# Altium PCB PCB1.PcbDoc
Units mil, origin at the board's own origin, x right, y up, seen from the top; angles counter-clockwise.
Board outline 6299.21 x 3937.01 mil, 4 copper layers (Top Layer, Top Inner, Bottom Inner, Bottom Layer), stack 60.709 mil thick; 58 components, 46 nets, 194 pads, 24 vias.
Unrouted connection lines stored in the file: 96.
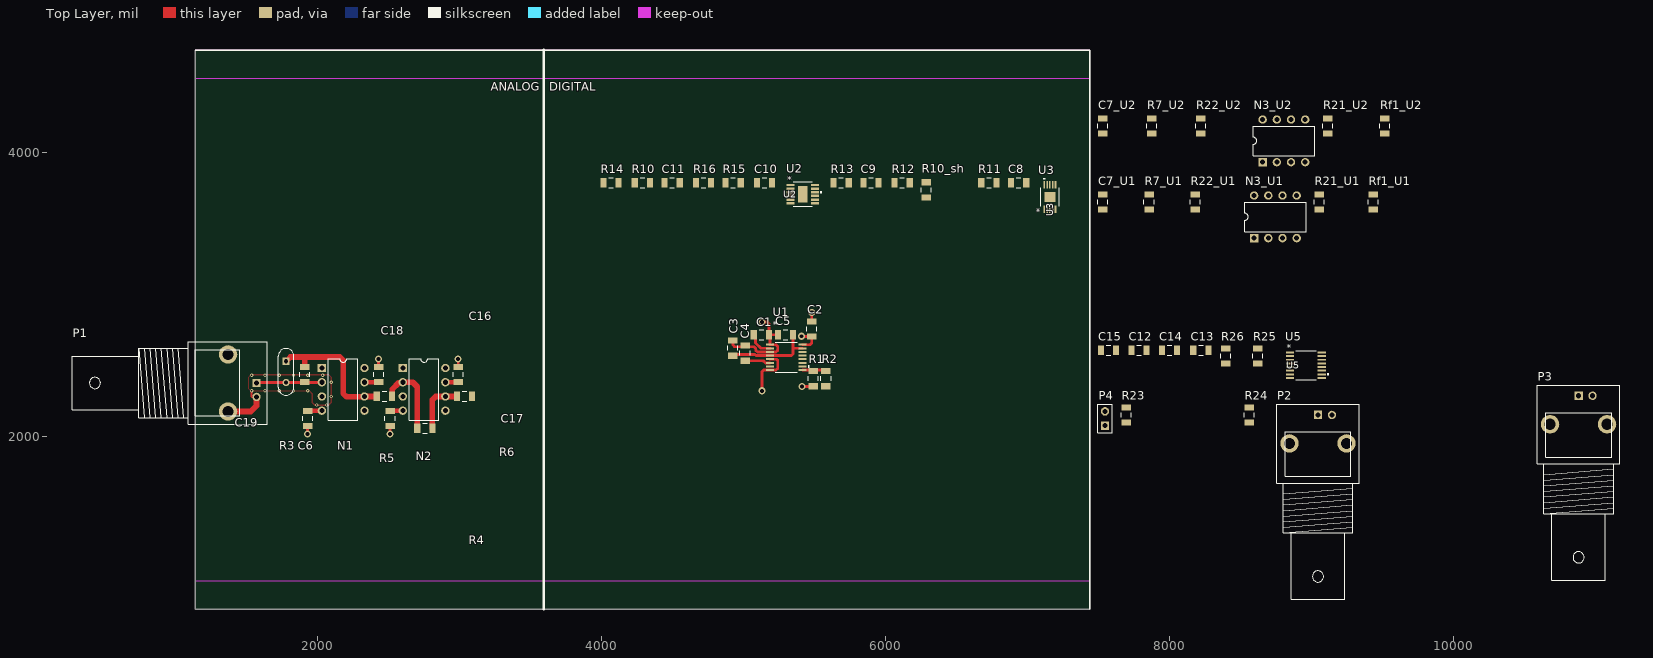
[diagram p0: Top Layer view]
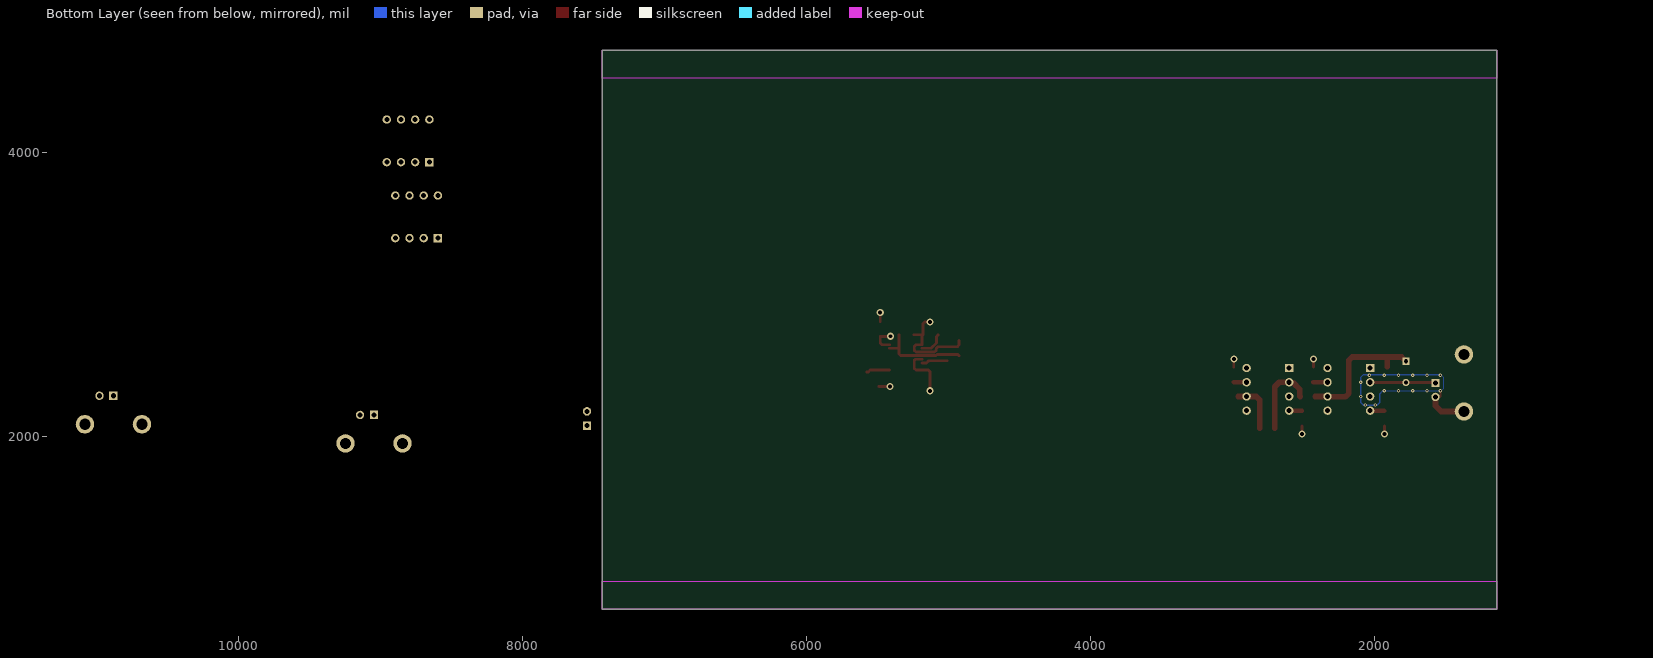
[diagram p1: Bottom Layer view, seen from below]
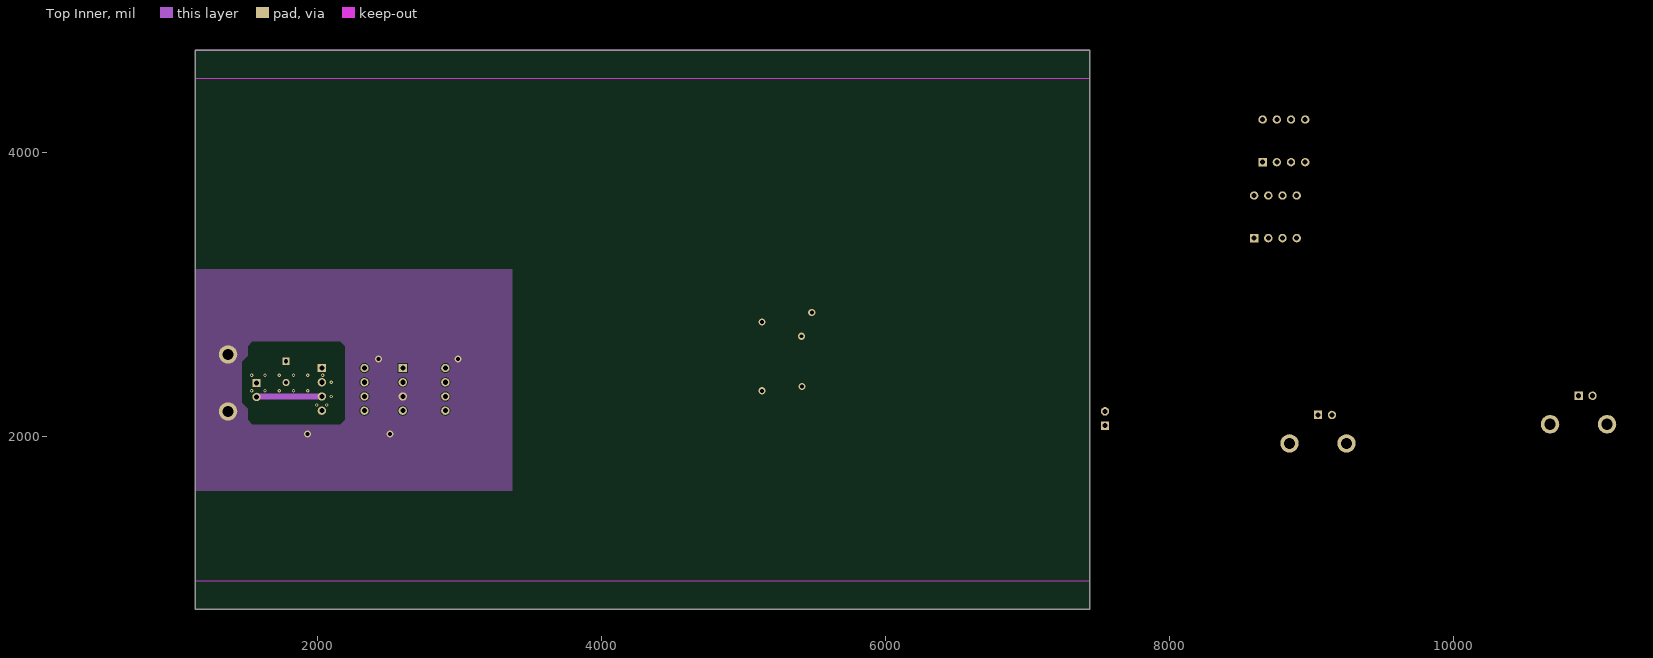
[diagram p2: Top Inner]
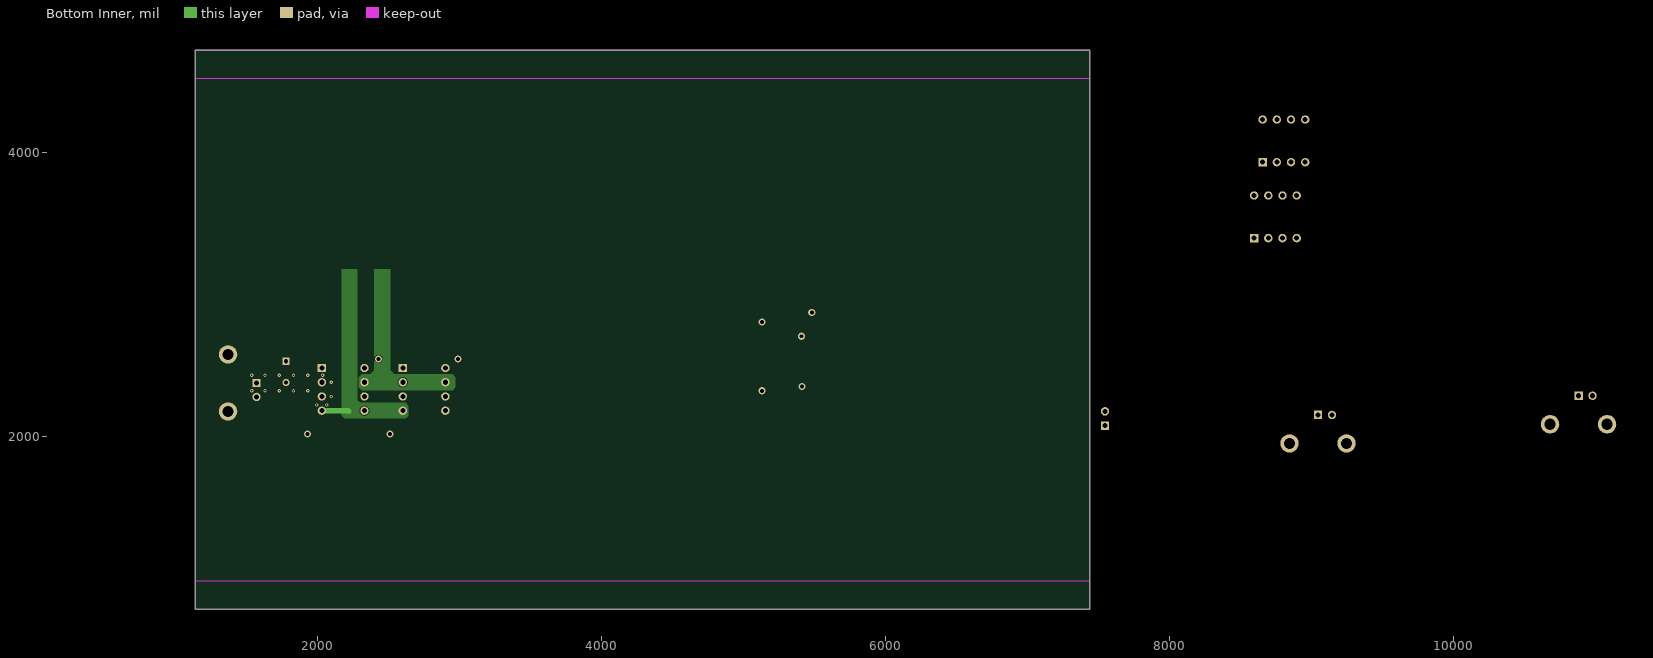
[diagram p3: Bottom Inner]

## Layer stack, top to bottom
Top Solder: solder mask 0.9843, Solder Resist, Dk 3.5
Top Layer: signal copper 1.378
Dielectric 1: prepreg 5.3543, PP-006, Dk 4.5
Top Inner: signal copper 1.378
Dielectric 2: dielectric 44.4882, FR-4, Dk 4.5
Bottom Inner: signal copper 1.378
Dielectric 3: prepreg 5.3543, PP-006, Dk 4.5
Bottom Layer: signal copper 1.378
Bottom Solder: solder mask 0.9843, Solder Resist, Dk 3.5

## Board outline
1137.4,787.4 7436.61,787.4 7436.61,4724.41 1137.4,4724.41

## Design rules (kind name [scope] priority, off if disabled: settings)
Clearance Clearance_1 [All] p1: gap=5 ignorepadtopadclearanceinfootprint=TRUE
Clearance [InNet('GUARD_RING') vs InNet('NetC6_1')] p2: gap=10 ignorepadtopadclearanceinfootprint=TRUE
DiffPairsRouting Diff_100_Ohms [All] p1: maxlimit=7 minlimit=5 mostfreqgap=6 toplayer_minwidth=13 toplayer_maxwidth=15 toplayer_prefwidth=14 midlayer1_minwidth=13 midlayer1_maxwidth=15 midlayer1_prefwidth=14 midlayer2_minwidth=13 midlayer2_maxwidth=15 midlayer2_prefwidth=14 bottomlayer_minwidth=13 bottomlayer_maxwidth=15 bottomlayer_prefwidth=14 maxuncoupledlength=50
HoleSize [All] p1: absolutevalues=TRUE maxlimit=137.8 minlimit=1 maxpercent=80.000 minpercent=20.000
PolygonConnect [All] p1: connectstyle=Direct reliefconductorwidth=10 reliefentries=4 polygonreliefangle="90 Angle" airgapwidth=10
RoutingVias [All] p1: holewidth=28 width=50 viastyle="Through Hole" minholewidth=11.81 minwidth=23.62 maxholewidth=28 maxwidth=50
SolderMaskExpansion SolderMaskExpansion_1 [All] p1: expansion=4 istentingtop=FALSE
Width [All] p1: maxlimit=40 minlimit=10 preferedwidth=14
28 further rules are at their usual default settings.

## Classes and differential pairs
component class U_DAC: C12 C13 C14 C15 R25 R26 U5
channel class DAC_Diver: U1 U2
component class U2: C7_U2 N3_U2 R7_U2 R21_U2 R22_U2 Rf1_U2
component class U1: C7_U1 N3_U1 R7_U1 R21_U1 R22_U1 Rf1_U1
component class U_OPV_Psu: C8 C9 C10 C11 R10 R10_sh R11 R12 R13 R14 R15 R16 U2 U3
component class U_Source_OPV_ADC: C1 C2 C3 C4 C5 C6 C16 C17 C18 C19 N1 N2 R1 R2 R3 R4 R5 R6 U1
component class TOP_Sheet: P1 P2 P3 P4 R23 R24

## Components (designator, comment, footprint, x,y, rotation, side; value= is the part's Value field where it differs from the comment)
C1 "0.1uF" C1206-KUE 5125,2720 r180 top
C2 "0.1uF" C1206-KUE 5480,2760 r270 top
C3 "10uF" C1206-KUE 4925,2625 r270 top
C4 "10uF" C1206-KUE 5010,2590 r270 top
C5 "100nF" C1206-KUE 5295,2720 r0 top
C6 "100nF" C1206-KUE 1910,2440 r90 top
C7_U1 "10uF" C1206-KUE 7530,3655 r90 top (schematic designator C7)
C7_U2 "10uF" C1206-KUE 7530,4190 r90 top (schematic designator C7)
C8 "10uF" C1206-KUE 6936.85,3790 r0 top
C9 "4.7uF" C1206-KUE 5896.85,3790 r0 top
C10 "10uF" C1206-KUE 5146.85,3790 r0 top
C11 "4.7uF" C1206-KUE 4496.85,3790 r0 top
C12 "0.1uF" C1206-KUE 7785,2610 r0 top
C13 "0.1uF" C1206-KUE 8220,2610 r0 top
C14 "0.1uF" C1206-KUE 8000,2610 r0 top
C15 "10uF" C1206-KUE 7570,2610 r0 top
C16 "100nF" C1206-KUE 2990,2440 r270 top
C17 "100nF" C1206-KUE 2510,2130 r90 top
C18 "100nF" C1206-KUE 2430,2440 r270 top
C19 "100nF" C1206-KUE 1930,2130 r90 top
N1 "LMC6001" DIP8 2180,2335 r270 top
N2 "LMC6001" DIP8 2750,2335 r270 top
N3_U1 "LMC6001" DIP8 8745,3550 r0 top (schematic designator N3)
N3_U2 "LMC6001" DIP8 8805,4085 r0 top (schematic designator N3)
P1 "BNC" "BNC_RA CON" 1570,2380 r0 top
P2 "BNC" "BNC_RA CON" 9045,2155 r90 top
P3 "BNC" "BNC_RA CON" 10880,2290 r90 top
P4 "Header 2" HDR1X2 7545,2080 r90 top
R1 "10k" C1206-KUE 5490,2410 r90 top
R2 "1k" C1206-KUE 5580,2410 r90 top
R3 "CNS020-10MP" RES_CNS020_VIS 1778.11,2533.11 r270 top
R4 "10k" C1206-KUE 2755,2060 r180 top
R5 "33k" C1206-KUE 2470,2285 r180 top
R6 "10" C1206-KUE 3035,2285 r180 top
R7_U1 "10k" C1206-KUE 7855,3655 r90 top (schematic designator R7)
R7_U2 "10k" C1206-KUE 7875,4190 r90 top (schematic designator R7)
R10 "255k" C1206-KUE 4286.85,3790 r0 top
R10_sh "0" C1206-KUE 6286.85,3740 r90 top
R11 "255k" C1206-KUE 6726.85,3790 r0 top
R12 "78.7k" C1206-KUE 6116.85,3790 r0 top
R13 "10k" C1206-KUE 5686.85,3790 r0 top
R14 "10k" C1206-KUE 4066.85,3790 r0 top
R15 "78.7k" C1206-KUE 4926.85,3790 r0 top
R16 "0" C1206-KUE 4716.85,3790 r0 top
R21_U1 "10k" C1206-KUE 9055,3655 r90 top (schematic designator R21)
R21_U2 "10k" C1206-KUE 9115,4190 r90 top (schematic designator R21)
R22_U1 "100" C1206-KUE 8180,3655 r90 top (schematic designator R22)
R22_U2 "100" C1206-KUE 8220,4190 r90 top (schematic designator R22)
R23 "10k" C1206-KUE 7695,2155 r90 top
R24 "10k" C1206-KUE 8560,2155 r90 top
R25 "10k" C1206-KUE 8620,2570 r90 top
R26 "10k" C1206-KUE 8395,2570 r90 top
Rf1_U1 "20k" C1206-KUE 9435,3655 r90 top (schematic designator Rf1)
Rf1_U2 "20k" C1206-KUE 9515,4190 r90 top (schematic designator Rf1)
U1 "ADS8681IPW" PW16_TEX 5300,2560 r0 top
U2 "LT3094EMSE#TRPBF" MSE_05-08-1666_ADI 5416.85,3710 r0 top
U3 "LT3042EMSE#TRPBF" 05-08-1664_ADI 7156.85,3690 r90 top
U5 "AD5689RBRUZ" RU_16_ADI 8960,2505 r0 top

## Footprints (in the part's own frame and the unit in brackets; to place one, negate y for a bottom-side part, rotate by r counter-clockwise, add the part's x,y. Pads: shape width x height; smd on the part's side, far side on the other; paste and mask are expansions set on the pad)
05-08-1664_ADI [mil]
  rect 52.28x11 smd paste+0 mask+0: 1(-87.14,39.37) 2(-87.14,19.69) 3(-87.14,0) 4(-87.14,-19.68) 5(-87.14,-39.37) 6(87.14,-39.37) 7(87.14,-19.68) 8(87.14,0) 9(87.14,19.69) 10(87.14,39.37)
  rect 70x78 smd paste+0 mask+0: 11(0,0)
  silkscreen extent -66,-66 133,66, body extent -99,-61 99,61, height 43
"BNC_RA CON" [mm] "Connector; BNC Elbow"
  rect 1.5x1.5 hole 0.9: 1(0,0)
  round 3.3 hole 2: 2(-5.1,-5.1) 2(-5.1,5.1)
  round 1.5 hole 0.9: 2(0,-2.5)
  silkscreen extent -33,-7.4 1.9,7.4
C1206-KUE [mm] "Chip Capacitor, Body 3.2x1.6mm, IPC High Density"
  rect 1.1x1.7 smd: 1(-1.35,0) 2(1.35,0)
  silkscreen extent -0.4,-0.9 0.4,0.9, body extent -1.6,-0.8 1.6,0.8, height 0.95
DIP8 [mm] "DIP; 8 Leads; Row Spacing 7.62 mm; Pitch 2.54 mm"
  rect 1.5x1.5 hole 0.9: 1(-3.81,-3.81)
  round 1.5 hole 0.9: 2(-1.27,-3.81) 3(1.27,-3.81) 4(3.81,-3.81) 5(3.81,3.81) 6(1.27,3.81) 7(-1.27,3.81) 8(-3.81,3.81)
  silkscreen extent -5.5,-2.65 5.5,2.65
HDR1X2 [mm] "Connector; Header; 2 Position"
  rect 1.5x1.5 hole 0.9: 1(0,0)
  round 1.5 hole 0.9: 2(2.54,0)
  silkscreen extent -1.27,-1.27 3.81,1.27
MSE_05-08-1666_ADI [mil]
  rect 54.56x16.97 smd paste+0 mask+0: 1(-86,63.98) 2(-86,38.39) 3(-86,12.8) 4(-86,-12.8) 5(-86,-38.39) 6(-86,-63.98) 7(86,-63.98) 8(86,-38.39) 9(86,-12.8) 10(86,12.8) 11(86,38.39) 12(86,63.98)
  rect 69x116 smd paste-57.5 mask+0: 13(0,0)
  silkscreen extent -66,-86 133,86, body extent -99,-81 99,81, height 43
PW16_TEX [mil]
  rect 58x14 smd paste+0 mask+0: 1(-115,89.57) 2(-115,63.98) 3(-115,38.39) 4(-115,12.8) 5(-115,-12.8) 6(-115,-38.39) 7(-115,-63.98) 8(-115,-89.57) 9(115,-89.57) 10(115,-63.98) 11(115,-38.39) 12(115,-12.8) 13(115,12.8) 14(115,38.39) 15(115,63.98) 16(115,89.57)
  silkscreen extent -76,-106 164,106, body extent -130,-101 130,101, height 47
RES_CNS020_VIS [mil]
  rect 50x50 hole 30 paste-25 mask+0: 1(0,0)
  round 50 hole 30 paste-25 mask+0: 2(150,0)
  silkscreen extent -89,-55 239,55, body extent -84,-50 234,50, height 260
RU_16_ADI [mm]
  rect 1.461x0.351 smd paste+0 mask+0: 1(-2.825,2.275) 2(-2.825,1.625) 3(-2.825,0.975) 4(-2.825,0.325) 5(-2.825,-0.325) 6(-2.825,-0.975) 7(-2.825,-1.625) 8(-2.825,-2.275) 9(2.825,-2.275) 10(2.825,-1.625) 11(2.825,-0.975) 12(2.825,-0.325) 13(2.825,0.325) 14(2.825,0.975) 15(2.825,1.625) 16(2.825,2.275)
  silkscreen extent -1.81,-2.63 4.06,2.63, body extent -3.2,-2.5 3.2,2.5, height 1.2

## Part data
C1 C2 C3 C4 C5 C6 C7_U1 C7_U2 C8 C9 C10 C11 C12 C13 C14 C15 C16 C17 C18 C19: library part Capacitor, "Capacitor", Manufacturer=Kemet, Bezeichnung="Kerko +-10% 63V", LatestRevisionDate=17-Jul-2002, LatestRevisionNote="Re-released for DXP Platform.", PackageDescription="Radial Cap, Thru-Hole; 2 Leads; 0.3 in Pin Spacing", PackageReference=RAD-0.3, Published=8-Jun-2000, Publisher="Altium Limited"
N1 N2 N3_U1 N3_U2: library part UA741AN, "General-Purpose Single Operational Amplifier", Code_JEDEC=MO-001-AN, ComponentLink1Description="Manufacturer Link", ComponentLink1URL=http://www.st.com/, ComponentLink2Description=Datasheet, ComponentLink2URL=http://www.st.com/stonline/products/literature/ds/5304/ua741.pdf, DatasheetVersion=Oct-1997, LatestRevisionDate=06-Jun-2005, LatestRevisionNote="Stylized 3D Model Added.", PackageDescription="DIP; 8 Leads; Row Spacing 7.62 mm; Pitch 2.54 mm", PackageReference=DIP8, Published=24-Aug-2001, Publisher="Altium Limited"
P1 P2 P3: "BNC Elbow Connector", LatestRevisionDate=17-Jul-2002, LatestRevisionNote="Re-released for DXP Platform.", Publisher="Altium Limited"
P4: "Header, 2-Pin", LatestRevisionDate=17-Jul-2002, LatestRevisionNote="Re-released for DXP Platform.", Publisher="Altium Limited"
R1 R2 R4 R5 R6 R7_U1 R7_U2 R10 R10_sh R11 R12 R13 R14 R15 R16 R21_U1 R21_U2 R22_U1 R22_U2 R23 R24 R25 R26 Rf1_U1 Rf1_U2: library part ResistorSMD, "Resistor SMD", Manufacturer=AVX, Bezeichnung="SMD Wid. 1/8W 2%", LatestRevisionDate=17-Jul-2002, LatestRevisionNote="Re-released for DXP Platform.", PackageDescription="Axial Device, Thru-Hole; 2 Leads; 0.4 in Pin Spacing", PackageReference=AXIAL-0.4, Published=8-Jun-2000, Publisher="Altium Limited"
R3: library part CNS020-10KP, "CNS 020 10K 0,02% e2", Manufacturer_Name=Vishay, Copyright="Copyright (C) 2026 Ultra Librarian. All rights reserved.", Datasheet=https://www.vishay.com/doc?60051, Manufacturer_Part_Number=CNS020-10KP
U1: "16-bit, 1MSPS 1-ch SAR ADC with programmable (Â±12V, Â±10V, Â±6V, Â±5V, Â±2.5V) input ranges on 5V supply 16-TSSOP -40 to 125", Manufacturer_Name="Texas Instruments", Copyright="Copyright (C) 2025 Ultra Librarian. All rights reserved.", Manufacturer_Part_Number=ADS8681IPW, RefDes=RefDes, Type=Type
U2: library part LT3094EMSETRPBF, "âˆ’20V, 500mA, Ultralow Noise, Ultrahigh PSRR Negative Linear Regulator", Manufacturer_Name="Analog Devices Inc", Copyright="Copyright (C) 2025 Ultra Librarian. All rights reserved.", Manufacturer_Part_Number=LT3094EMSE#TRPBF, RefDes=RefDes, Type=Type
U3: library part LT3042EMSETRPBF, "20V, 200mA, Ultralow Noise, Ultrahigh PSRR RF Linear Regulator", Manufacturer_Name="Analog Devices Inc", Copyright="Copyright (C) 2025 Ultra Librarian. All rights reserved.", Manufacturer_Part_Number=LT3042EMSE#TRPBF, RefDes=RefDes, Type="Power Management"
U5: "Dual, 16-Bit nanoDAC+ with 2 ppm/Â°C Reference, SPI Interface", Manufacturer_Name="Analog Devices Inc", Copyright="Copyright (C) 2026 Ultra Librarian. All rights reserved.", Manufacturer_Part_Number=AD5689RBRUZ, RefDes=RefDes, Type=Type

## Via types
v1: diameter 23.62, hole 11.81, Top Layer to Bottom Layer, tented top, 15 vias
v2: diameter 50, hole 28, Top Layer to Bottom Layer, 9 vias

## Nets (pads, with @x,y where several pads share a name; then routed paths per layer and width w, separated by ;. In a path a pad name is that pad's centre, name@x,y a point inside that pad or via, vN(x,y) a via of type N, cw(c..) or ccw(c..) an arc to the next point about the centre after c; other vN are vias at no path point)
ADC_Alarm: U1.14
ADC_CS*: U1.11
ADC_SDI: U1.10
ADC_SDO: U1.13
AGND: C1.1 C2.1 C3.1 C4.1 C5.1 C7_U1.1 C7_U2.1 C8.1 C9.1 C10.1 C11.1 C12.1 C13.1 C14.1 C15.1 C16.1 C17.1 C18.1 C19.1 N1.3 N2.3 P1.2 P2.2 P3.2 R10_sh.2 R12.2 R13.2 R14.2 R15.2 R16.2 R25.2 R26.2 U1.1 U1.3 U1.5 U1.8 U2.9 U3.8 U3.11 U5.4 | length 2227.4
  Top Layer w12: v1(1535,2325) 1535,2285 1540,2280 1568.43,2280 P1.2@1570,2281.57
  Top Layer w20: v2(1930,2020) C19.1 ; C18.1 v2(2430,2550) ; v2(2510,2020) C17.1 ; C16.1 v2(2990,2550) ; C3.1 4925,2646.72 4936.72,2635 5073.28,2635 5085,2623.28 5085,2610.1 5096.72,2598.39 U1.3 5228.28,2598.39 5240,2610.1 5240,2637.85 5228.28,2649.57 U1.1 5185,2713.15 C1.1 ; v2(5130,2325) 5130,2458.72 5141.72,2470.43 U1.8 5228.28,2470.43 5240,2482.15 5240,2540 5232.8,2547.2 U1.5 ; v2(5130,2810) 5168.28,2810 5180,2798.28 5180,2721.85 C1.1 ; C5.1 C1.1 ; C2.1 v2(5480,2875)
  Top Layer w40: P1.2@1369.21,2179.21 1529.21,2179.21 1570,2220 P1.2@1570,2281.57
  Top Inner w40: P1.2@1369.21,2580.79 P1.2@1378.36,2589.94 ; P1.2@1570,2281.57 1573.43,2285 N1.3
  other v1: 1995,2225 2065,2225 2095,2285 1630,2325 1730,2325 1830,2325 1930,2325 2095,2385 1535,2435 1630,2435 1730,2435 1830,2435 1930,2435 2035,2435
AVDD: C1.2 C12.2 C15.2 U1.2 U5.5 | length 180.2
  Top Layer w20: C1.2 5083.5,2708.35 5083.5,2661.85 5121.38,2623.98 U1.2
DAC_*SYNC: U5.13
DAC_Gain: U5.10
DAC_SCLK: U5.12
DAC_SDI: U5.14
DAC_SDO: U5.8
DVDD: C2.2 C13.2 R1.1 R23.1 R24.1 U1.16 U5.11 | length 268.1
  Top Layer w20: v2(5409,2709) 5410.07,2707.93 5478.93,2707.93 C2.2 5480,2661.28 5468.28,2649.57 U1.16 ; v2(5410,2355) 5488.15,2355 R1.1
neg_out: C10.2 C17.2 C19.2 N1.4 N2.4 N3_U1.4 N3_U2.4 R10.1 U2.10 U2.11 U2.12 | length 382.3
  Top Layer w30: C19.2 1931.85,2185 N1.4 ; C17.2@2509.07,2184.07 C17.2 ; C17.2@2511.85,2185 N2.4
  Bottom Inner w40: N1.4 2215,2185 2220,2180
NetC6_1: C6.1 N1.2 P1.1 R3.2 | length 463
  Top Layer w10: N1.2@2032.64,2382.64 N1.2@2033.11,2383.11
  Top Layer w20: P1.1@1570.28,2383.11 R3.2 ; R3.2@1778.11,2382.64 1910,2382.64 N1.2@2032.64,2382.64
NetC6_2: C6.2 N1.6 R3.1 R5.2 | length 976.8
  Top Layer w40: R3.1 1808.11,2563.11 1910,2563.11 ; C6.2 1910,2563.11 ; N1.6 R5.2 ; N1.6@2333.11,2283.11 2203.43,2283.11 2180,2306.54 2180,2539.68 2156.57,2563.11 1910,2563.11
NetC7_U1_2: C7_U1.2 N3_U1.3 R7_U1.1
NetC7_U2_2: C7_U2.2 N3_U2.3 R7_U2.1
NetC9_2: C9.2 R12.1 U3.7
NetC11_2: C11.2 R15.1 U2.8
NetC14_2: C14.2 R21_U1.2 R21_U2.2 U5.1
NetN2_2: N2.2 R4.2 R5.1 | length 554.7
  Top Layer w40: R5.1 2524.8,2286.65 2524.8,2334.8 2571.35,2381.35 2596.35,2381.35 N2.2 2670,2385 2701.85,2353.15 R4.2
NetN2_6: N2.6 R4.1 R6.2 | length 361.8
  Top Layer w40: R4.1 2808.15,2261.57 2831.58,2285 2958.66,2285
NetN3_U1_2: N3_U1.2 R21_U1.1 Rf1_U1.2
NetN3_U1_6: N3_U1.6 R22_U1.2 Rf1_U1.1
NetN3_U2_2: N3_U2.2 R21_U2.1 Rf1_U2.2
NetN3_U2_6: N3_U2.6 R22_U2.2 Rf1_U2.1
NetP2_1: P2.1 R22_U1.1
NetP3_1: P3.1 R22_U2.1
NetP4_1: P4.1 U2.1 U2.2 U2.3 U2.13
NetP4_2: P4.2 U3.1 U3.2 U3.3
NetR1_2: R1.2 R2.2 U1.9 | length 165.1
  Top Layer w20: U1.9 5490,2470.43 5550.91,2470.43 5563.19,2458.15 R2.2@5575,2458.15
NetR2_1: R2.1 R24.2
NetR7_U1_2: R7_U1.2 U5.7
NetR7_U2_2: R7_U2.2 U5.3
NetR10_2: R10.2 R14.1 U2.5
NetR10_sh_1: R10_sh.1 U3.5
NetR11_2: R11.2 R13.1 U3.6
NetR16_1: R16.1 U2.6
NetR23_2: R23.2 U5.15
NetR25_1: R25.1 U5.16
NetR26_1: R26.1 U5.9
pos_out: C8.2 C16.2 C18.2 N1.7 N2.7 N3_U1.7 N3_U2.7 R11.1 U3.9 U3.10 | length 199.2
  Top Layer w30: N1.7 2428.15,2385 C18.2 C18.2@2430.93,2385.93 ; N2.7@2893.66,2385 2988.15,2385 C16.2
REFCAP: C4.2 U1.6 | length 181.3
  Top Layer w20: C4.2 5138.14,2536.85 5153.38,2521.61 U1.6
REFIO: C3.2 C5.2 U1.4 U1.15 | length 625
  Top Layer w20: C3.2 4933.15,2580 5079.75,2580 5086.36,2573.39 5184.41,2573.39 U1.4 5336.43,2572.8 5348.15,2584.51 5348.15,2635.69 C5.2 ; 5359.87,2623.98 U1.15
SCLK: U1.12
TIA_OUT: R6.1 U1.7
pads on no net: N1.1 N1.5 N1.8 N2.1 N2.5 N2.8 N3_U1.1 N3_U1.5 N3_U1.8 N3_U2.1 N3_U2.5 N3_U2.8 U2.4 U2.7 U3.4 U5.2 U5.6

## Polygon pours and split planes (outlines as drawn)
AGND on Top Layer "NONET_L-01_P-001" (solid, pour order 4): 2080,2440 2100,2420 2100,2240 2080,2220 1980,2220 1960,2240 1960,2300 1940,2320 1530,2320 1510,2340 1510,2420 1530,2440
no net on Top Solder "NONET_L-01_P-001" (solid, pour order 8): 1530,2455 1495,2420 1495,2340 1530,2305 1935,2305 1945,2295 1945,2240 1980,2205 2080,2205 2115,2240 2115,2420 2080,2455
AGND on Bottom Layer "NONET_L-01_P-001" (solid, pour order 7): 2080,2440 2100,2420 2100,2240 2080,2220 1980,2220 1960,2240 1960,2300 1940,2320 1530,2320 1510,2340 1510,2420 1530,2440
no net on Bottom Solder "NONET_L-01_P-001" (solid, pour order 9): 1530,2455 1495,2420 1495,2340 1530,2305 1935,2305 1945,2295 1945,2240 1975,2210 2085,2210 2115,2240 2115,2420 2080,2455
neg_out on Bottom Inner "NEG_OUT_L03_P025" (solid, pour order 25): 2620,2240 2640,2220 2640,2150 2620,2130 2190,2130 2170,2150 2170,3180 2280,3180 2280,2260 2300,2240
pos_out on Bottom Inner "POS_OUT_L03_P026" (solid, pour order 26): 2310,2440 2290,2420 2290,2350 2310,2330 2950,2330 2970,2350 2970,2420 2950,2440 2540,2440 2510,2470 2510,3180 2400,3180 2400,2470 2370,2440
AGND on Top Inner "AGND_L02_P023" (solid, pour order 23): 1140,3180 3370,3180 3370,1620 1140,1620

## Keep-outs
Keep-Out Layer:
  rectangle: 1137.4,4527.4 7436.61,4724.25
  rectangle: 1137.4,787.4 7436.61,984.25

## Other copper
Top Layer:
  pour cut-out: 1945,2330 1970,2305 1970,2245 1985,2230 2075,2230 2090,2245 2090,2420 2080,2430 1530,2430 1520,2420 1520,2340 1530,2330
Top Inner:
  pour cut-out: 1510,2570 1470,2530 1470,2240 1510,2200 1510,2120 1540,2090 2160,2090 2190,2120 2190,2640 2160,2670 1540,2670 1510,2640
Bottom Layer:
  pour cut-out: 1945,2330 1970,2305 1970,2245 1985,2230 2075,2230 2090,2245 2090,2420 2080,2430 1530,2430 1520,2420 1520,2340 1530,2330

## Silkscreen, mask and mechanical layers (free items; w line width, h text height)
Top Overlay:
  lines w10: 7436.61,787.4 7436.61,4724.41
  lines w10.08: 1137.4,4724.41 7436.61,4724.41
  lines w20: 3592.01,787.4 3592.01,4724.41
  text "ANALOG" at 3218,4438 h60
  text "DIGITAL" at 3633,4438 h60
Mechanical 4:
  lines w10: 1137.4,4724.41 1137.4,787.4 7436.61,787.4 ; 4287.01,787.4 4291.34,787.4

## Dimensions
1137.4,787.4 to 7436.61,4724.41 on Mechanical 4
1137.4,787.4 to 1137.4,4724.41 on Mechanical 4

## Text inside footprints (layer, text, board x,y; h text height)
U1: Top Overlay "*" at 5205,2765 h50; Mechanical 13 "*" at 5214,2607.5 h50
U2: Top Overlay "*" at 5308.35,3785.94 h50; Mechanical 13 "*" at 5358.35,3738.5 h50
U3: Top Overlay "*" at 7111.48,3580.36 h50 r90; Mechanical 13 "*" at 7148.85,3631.5 h50 r90
U5: Top Overlay "*" at 8826.28,2603.38 h50; Mechanical 13 "*" at 8873.92,2550.43 h50